# Altium PCB Nowhere_PCB_MkI.PcbDoc
Units mil, origin at the board's own origin, x right, y up, seen from the top; angles counter-clockwise.
Board outline 2755.91 x 2755.91 mil, 2 copper layers (Top Layer, Bottom Layer); 9 components, 9 nets, 30 pads, 0 vias.
Unrouted connection lines stored in the file: 10.
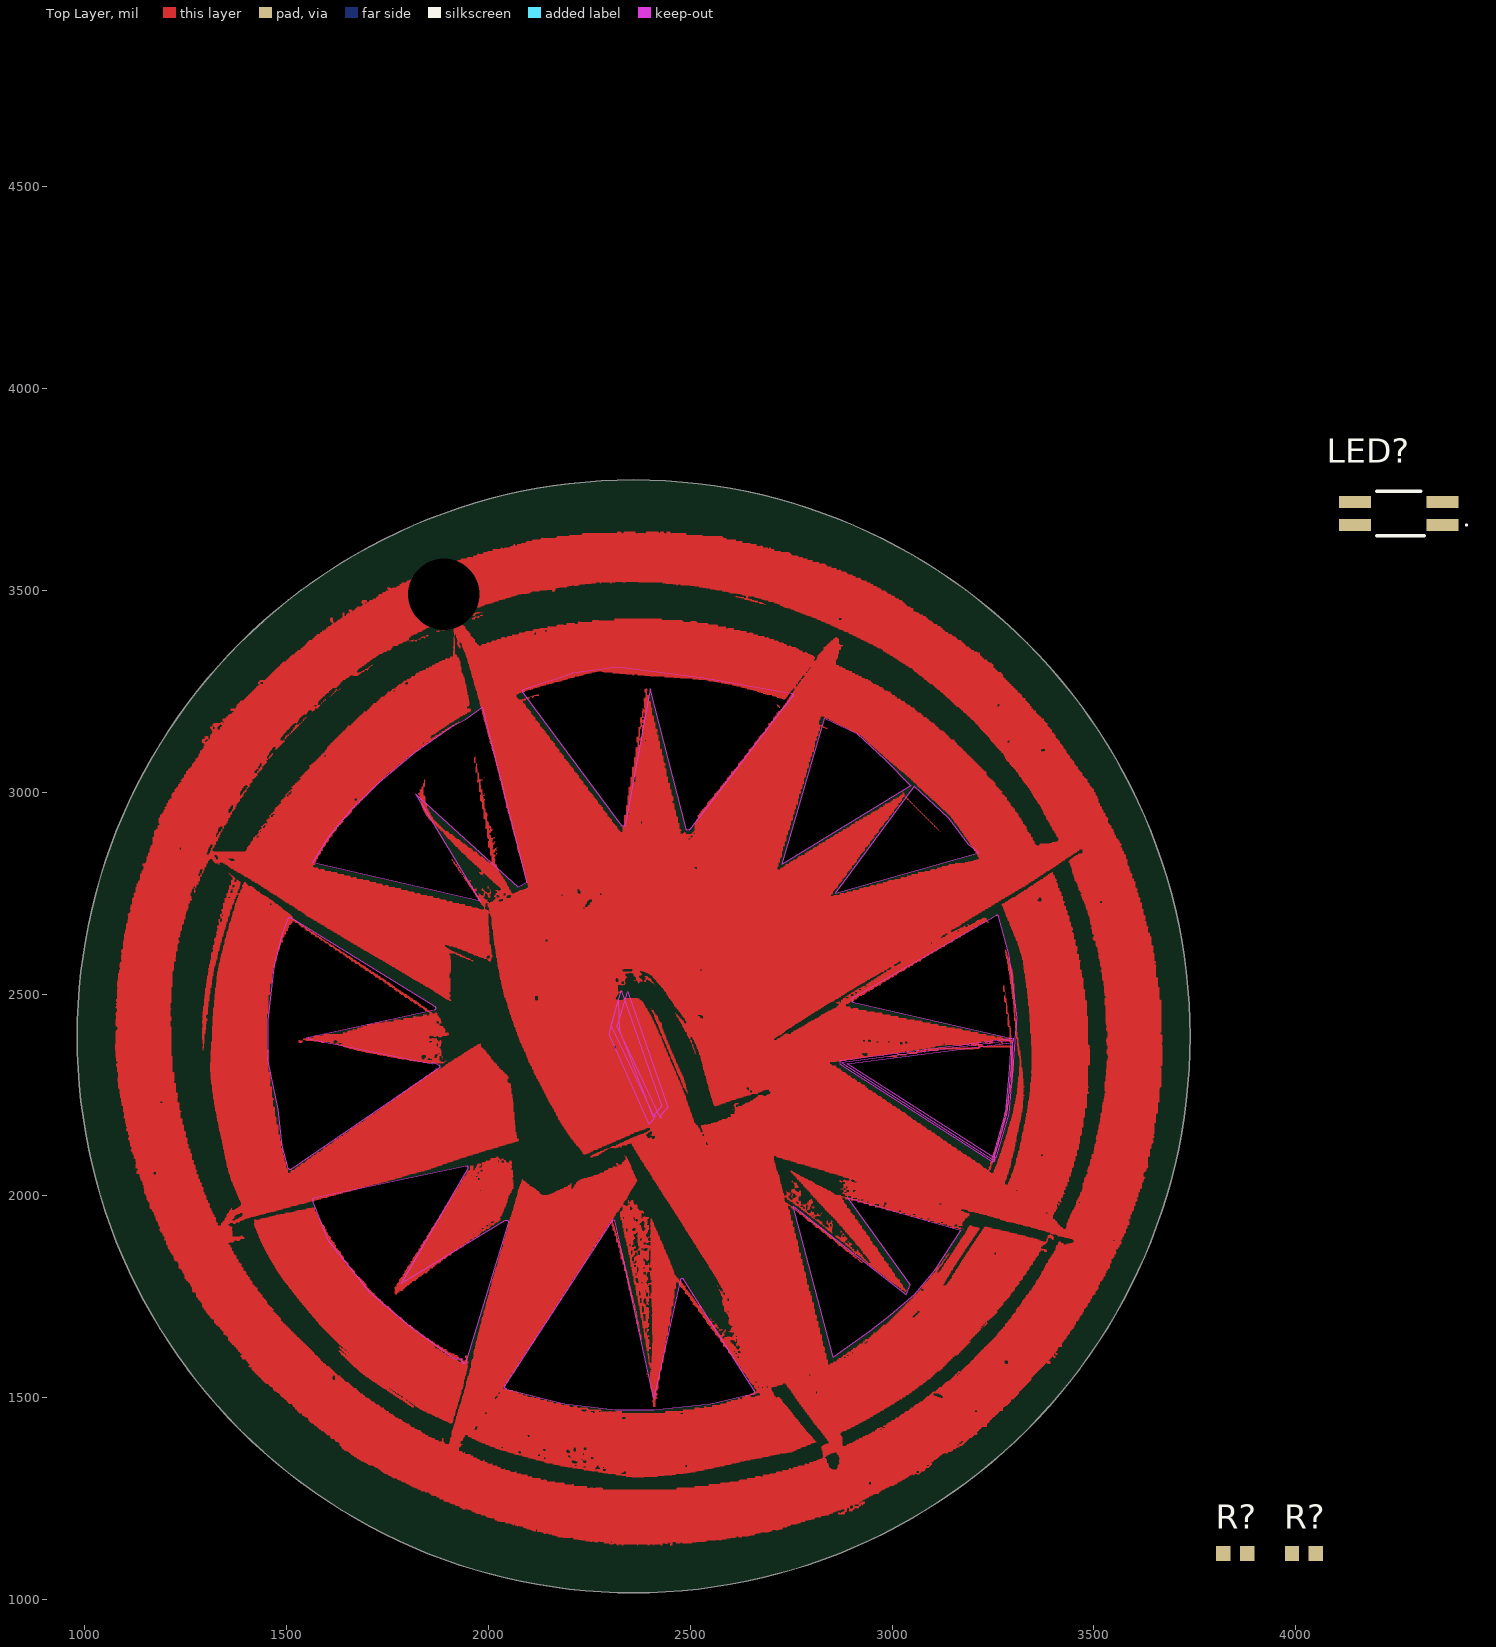
[diagram p0: Top Layer view]
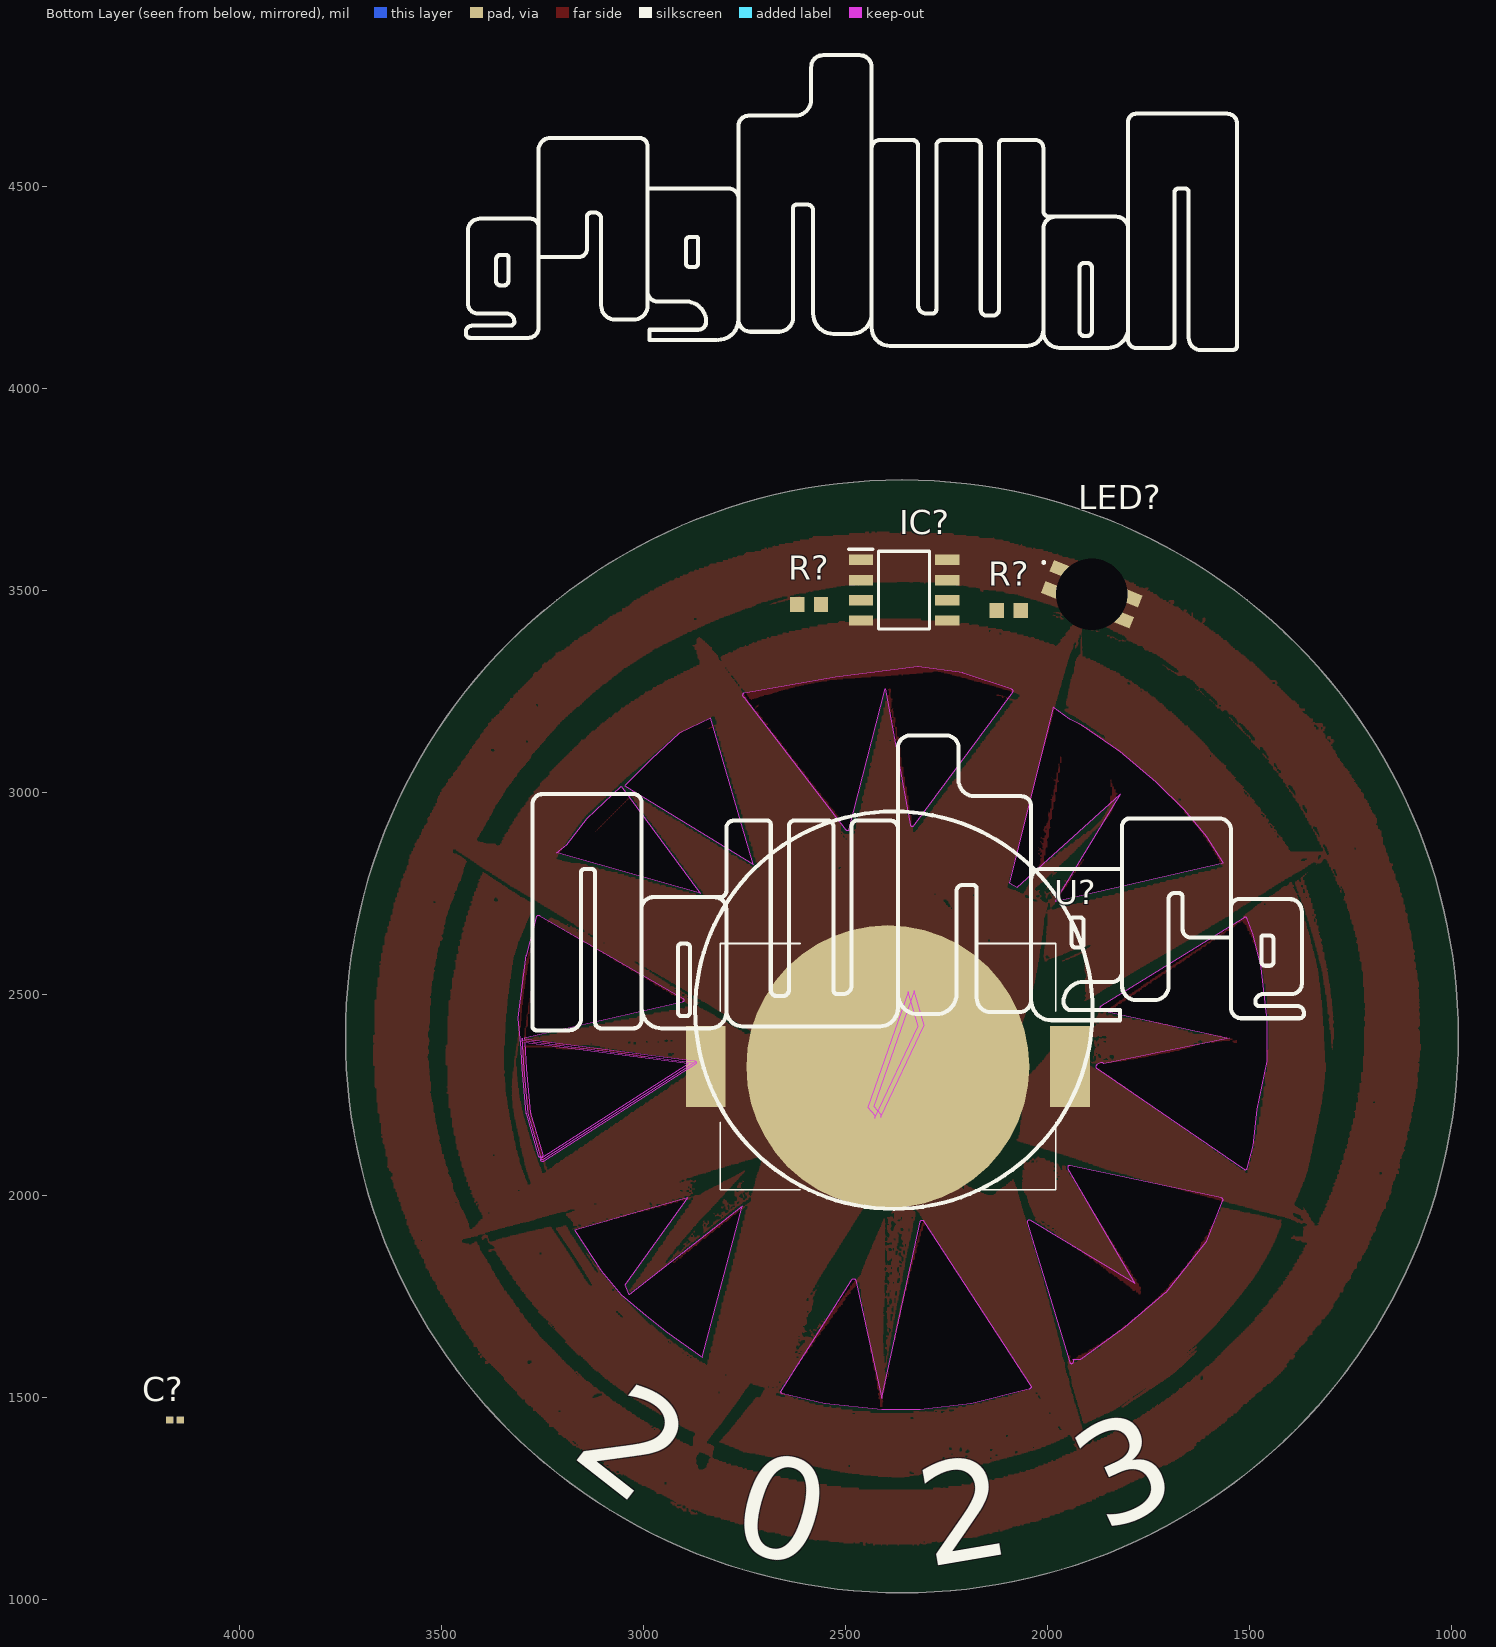
[diagram p1: Bottom Layer view, seen from below]

## Layer stack, top to bottom
Top Solder: solder mask 0.4, Solder Resist, Dk 3.5
Top Layer: signal copper 1.4
Dielectric 1: dielectric 12.6, FR-4, Dk 4.8
Bottom Layer: signal copper 1.4
Bottom Solder: solder mask 0.4, Solder Resist, Dk 3.5

## Board outline
2360,1017.05 cw(c2360,2395) 982.05,2395 cw(c2360,2395) 2360,3772.95 cw(c2360,2395) 3737.95,2395 cw(c2360,2395)
cut-out: 3247.3,2085.78 ccw(c3250,2090) 3255.01,2090 ccw(c3250,2090) 3252.7,2094.22 2889.31,2326.8 3294.25,2379.2 3290,2315.39 3280.05,2205.92 3250.18,2101.38 ccw(c3255,2100) 3259.82,2098.62 3289.82,2203.6 ccw(c3285.02,2205) 3289.99,2204.55 3299.99,2314.54 ccw(c3299.81,2314.56) 3300,2314.55 ccw(c3296.47,2314.88) 3300,2314.67 3304.55,2382.9 ccw(c3300,2385) 3305.01,2385 3305.01,2389.75 3309.99,2439.49 ccw(c3305.05,2440) 3310.01,2440 ccw(c3305.05,2440) 3309.97,2440.64 3289.97,2595.64 ccw(c3285.04,2595.01) 3289.85,2596.28 3264.85,2691.28 ccw(c3260,2690) 3257.49,2694.34 2902.49,2489.34 ccw(c2905,2485) 2903.89,2480.11 3294.99,2391 3294.99,2390.17 3294.93,2389.4 2874.37,2334.98 ccw(c2875,2330) 2872.3,2325.78
cut-out: 2188.78,1485.13 ccw(c2190,1489.99) 2189.4,1485.02 2314.4,1470.02 ccw(c2315,1474.99) 2315,1469.98 2410,1469.98 ccw(c2410,1475) 2410.53,1470.01 2550.53,1485.01 ccw(c2550,1489.99) 2551.17,1485.12 2656.15,1510.12 ccw(c2655,1515) 2660.01,1515 ccw(c2655,1515) 2659.23,1517.69 2484.23,1792.69 ccw(c2480,1790) 2475.1,1791.09 2410.05,1498.36 2314.91,1936.04 ccw(c2310,1935) 2305.8,1937.73 2040.8,1530.04 ccw(c2045,1527.31) 2043.73,1522.46 ccw(c2047.65,1525.59) 2046.43,1520.72
cut-out: 3247.3,2085.78 ccw(c3250,2090) 3255.01,2090 ccw(c3250,2090) 3252.7,2094.22 2889.31,2326.8 3294.25,2379.2 3290,2315.39 3280.05,2205.92 3250.18,2101.38 ccw(c3255,2100) 3259.82,2098.62 3289.82,2203.6 ccw(c3285.02,2205) 3289.99,2204.55 3299.99,2314.54 ccw(c3299.81,2314.56) 3300,2314.55 ccw(c3296.47,2314.88) 3300,2314.67 3304.55,2382.9 ccw(c3300,2385) 3305.01,2385 3305.01,2389.75 3309.99,2439.49 ccw(c3305.05,2440) 3310.01,2440 ccw(c3305.05,2440) 3309.97,2440.64 3289.97,2595.64 ccw(c3285.04,2595.01) 3289.85,2596.28 3264.85,2691.28 ccw(c3260,2690) 3257.49,2694.34 2902.49,2489.34 ccw(c2905,2485) 2903.89,2480.11 3294.99,2391 3294.99,2390.17 3294.93,2389.4 2874.37,2334.98 ccw(c2875,2330) 2872.3,2325.78
cut-out: 2085.98,3247 2085.97,3247.01 cw(c2090,3250) 2088.43,3254.76 2208.4,3294.75 cw(c2210,3290.01) 2209.32,3294.97 2209.33,3294.97 2319.31,3309.97 cw(c2320,3305.01) 2320.61,3309.98 2320.62,3309.98 2525.59,3284.98 cw(c2525.03,3280.22) 2525.88,3284.94 2750.88,3244.94 cw(c2750,3240) 2755.01,3240 cw(c2750,3240) 2750.01,3234.99 cw(c2745,3235) 2748.97,3231.94 2498.98,2906.95 cw(c2497.12,2908.36) 2498.97,2906.94 2498.98,2906.95 cw(c2495,2910) 2490.14,2908.77 2400.85,3256.51 2339.94,2919.11 cw(c2335,2920) 2330.96,2917.02
cut-out: 1480.04,2214.21 1455.09,2333.98 cw(c1460,2335) 1454.98,2335 1454.98,2435 cw(c1460,2435) 1455.02,2435.6 1470.02,2565.55 cw(c1475,2565) 1470.13,2566.22 1490.13,2646.22 cw(c1495,2645) 1490.3,2646.76 1505.3,2686.76 cw(c1510,2685) 1512.65,2689.26 1867.63,2469.27 1867.64,2469.26 1867.63,2469.27 cw(c1865,2465) 1870.02,2465 cw(c1865,2465) 1866.08,2460.1 1549.37,2390.24 1860.93,2327.93 cw(c1865,2325) 1867.24,2329.49 1877.24,2324.49 cw(c1875,2320) 1880.02,2320 cw(c1875,2320) 1877.82,2315.85 1877.83,2315.86 1877.82,2315.85 1512.85,2065.87 1512.83,2065.86 1512.85,2065.87 cw(c1510,2070) 1505.16,2068.68 1490.16,2123.68 cw(c1495,2125) 1490.01,2124.46 1490.02,2124.45 1490.01,2124.46
cut-out: 1706.75,1761.18 cw(c1710,1765) 1706.08,1761.87 1606.08,1886.87 cw(c1610,1890) 1605.34,1888.15 1605.34,1888.14 1605.34,1888.15 1565.35,1988.12 cw(c1570,1990) 1568.95,1994.9 1568.97,1994.91 1943.93,2074.9 cw(c1945,2070) 1950.02,2070 cw(c1945,2070) 1949.33,2067.47 1784.18,1784.36 2042.42,1939.3 2042.41,1939.29 cw(c2045,1935) 2050.01,1935 cw(c2045,1935) 2049.79,1933.53 2049.8,1933.54 2049.79,1933.53 1944.8,1588.54 cw(c1940,1590) 1935.2,1591.46 1936.33,1595.16 cw(c1935,1600) 1935,1594.98 1920,1594.98 cw(c1920,1600) 1917.05,1595.94 1807.05,1675.94 cw(c1810,1680) 1806.75,1676.18
cut-out: 2860,2750 3215,2850 3190,2870 3140,2935 3055,3015
cut-out: 2875,2330 3250,2090 3251.98,2089.43 3285,2205 3295,2315 3300,2390 3300,2385
cut-out: 2855,1600 2755,1975 3035,1755 3045,1780 2890,1995 3170,1915 3105,1815 3055,1755 2995,1705 2945,1665
cut-out: 2728.41,2821.03 2833.18,3182.96 2912.16,3145.79 2981.52,3081.39 3046.95,3015.95
cut-out: 1565,2825 1605,2890 1660,2955 1730,3025 1820,3100 1915,3165 1945,3180 1985,3210 2095,2775 2075,2765 1820,2995 1980,2730

## Design rules (kind name [scope] priority, off if disabled: settings)
Clearance [All] p1: gap=10 ignorepadtopadclearanceinfootprint=FALSE except(0: Arc-Hole Track-Hole SMDPad-Hole THPad-Hole Via-Hole Fill-Hole Poly-Hole Region-Hole Text-Hole)
PolygonConnect [All] p1: connectstyle=Relief reliefconductorwidth=10 reliefentries=4 polygonreliefangle="90 Angle" airgapwidth=10
RoutingVias [All] p1: holewidth=28 width=50 viastyle="Through Hole" minholewidth=28 minwidth=50 maxholewidth=28 maxwidth=50
SolderMaskExpansion [All] p1: expansion=4 istentingtop=FALSE
Width [All] p1: maxlimit=10 minlimit=10 preferedwidth=10
30 further rules are at their usual default settings.

## Classes and differential pairs
component class Sheet1: C? IC? LED? R? U?

## Components (designator, comment, footprint, x,y, rotation, side; value= is the part's Value field where it differs from the comment)
C? "02013A120GAT2A" CAPC0603X33N 4160,1445 r180 bottom
IC? "ATTINY25-20SSU" SOIC127P600X175-8N 2355,3500 r180 bottom
LED? "IN-P32TRRRGB" INP32TRRRGB 1890,3490 r22 bottom
LED? "T36K3BGR-05D000121U1930" T36K3BGR05D000121U1930 4255,3690 r0 top
R? "CPF0603B10KE" RESC1608X55N 3850,1115 r0 top
R? "CPF0603B10KE" RESC1608X55N 4020,1115 r0 top
R? "CPF0603B10KE" RESC1608X55N 2095.47,3450 r180 bottom
R? "CPF0603B10KE" RESC1608X55N 2590,3465 r180 bottom
U? "BAT-HLD-001-TR" BATHLD001TR 2395,2320 r0 bottom

## Footprints (in the part's own frame and the unit in brackets; to place one, negate y for a bottom-side part, rotate by r counter-clockwise, add the part's x,y. Pads: shape width x height; smd on the part's side, far side on the other; paste and mask are expansions set on the pad)
BATHLD001TR [mm]
  rect 2.5x5.1 smd: 1(-11.45,0) 3(11.45,0)
  round 17.8 smd: 2(0,0)
  silkscreen extent -10.55,-7.75 10.55,7.75, body extent -11.45,-7.77 11.45,7.78, height 4.2
CAPC0603X33N [mm]
  rect 0.47x0.44 smd: 1(-0.335,0) 2(0.335,0)
  body extent -0.3,-0.15 0.3,0.15, height 0.33
INP32TRRRGB [mm]
  rect 1.28x0.8 smd: 1(2.365,-0.725) 2(-2.365,-0.725) 3(-2.365,0.725) 4(2.365,0.725)
  round 2.25 hole 4.5 unplated: MH1(0,0)
  silkscreen extent 3.5,-0.77 3.6,-0.68
RESC1608X55N [mm]
  rect 0.9x0.95 smd: 1(-0.75,0) 2(0.75,0)
  body extent -0.77,-0.4 0.77,0.4, height 0.46
SOIC127P600X175-8N [mm]
  rect 1.525x0.65 smd: 1(-2.712,1.905) 2(-2.712,0.635) 3(-2.712,-0.635) 4(-2.712,-1.905) 5(2.712,-1.905) 6(2.712,-0.635) 7(2.712,0.635) 8(2.712,1.905)
  silkscreen extent -3.47,-2.45 1.6,2.58, body extent -3,-2.45 3,2.45, height 1.75
T36K3BGR05D000121U1930 [mm]
  rect 2x0.75 smd: 1(2.75,-0.725) 2(-2.75,-0.725) 3(-2.75,0.725) 4(2.75,0.725)
  silkscreen extent -1.4,-1.4 4.3,1.4

## Part data
C?: "Capacitor", Manufacturer_Name=AVX, Mouser Part Number=581-02013A120GAT2A, Arrow Part Number=02013A120GAT2A, Arrow Price/Stock=https://www.arrow.com/en/products/02013a120gat2a/avx, Datasheet Link=http://www.mouser.com/catalog/supplier/library/pdf/AVXSurfaceMountCeramic.pdf, Height=0.33mm, Manufacturer_Part_Number=02013A120GAT2A, Mouser Price/Stock=https://www.mouser.com/Search/Refine.aspx?Keyword=581-02013A120GAT2A
IC?: "Integrated Circuit", Manufacturer_Name=Microchip, Mouser Part Number=556-ATTINY25-20SSU, Arrow Part Number=ATTINY25-20SSU, Arrow Price/Stock=https://www.arrow.com/en/products/attiny25-20ssu/microchip-technology?region=nac, Datasheet Link=http://www.atmel.com/Images/Atmel-2586-AVR-8-bit-Microcontroller-ATtiny25-ATtiny45-ATtiny85_Datasheet.pdf, Height=1.75mm, Manufacturer_Part_Number=ATTINY25-20SSU, Mouser Price/Stock=https://www.mouser.co.uk/ProductDetail/Microchip-Technology/ATTINY25-20SSU?qs=W7X4MxMep4%2FZkAO8oc8Rxw%3D%3D
LED?: "LED", Manufacturer_Name=Inolux, Mouser Part Number=743-IN-P32TRRRGB, Arrow Part Number=IN-P32TRRRGB, Arrow Price/Stock=https://www.arrow.com/en/products/in-p32trrrgb/inolux-corporation?region=nac, Datasheet Link=http://www.inolux-corp.com/datasheet/SMDLED/Mono%20Color%20Reverse%20Mount/IN-P32TRRRGB_V1.2.pdf, Height=1.17mm, Manufacturer_Part_Number=IN-P32TRRRGB, Mouser Price/Stock=https://www.mouser.co.uk/ProductDetail/Inolux/IN-P32TRRRGB?qs=stqOd1AaK7%252BDecAY%252B9SBpg%3D%3D
LED?: "LED", Manufacturer_Name=Harvatek, Datasheet Link=https://media.digikey.com/pdf/Data%20Sheets/Harvatek%20PDFs/T36K3BGR-05D000121U1930%20V1.1.pdf, Height=1.95mm, Manufacturer_Part_Number=T36K3BGR-05D000121U1930
R? R? R? R?: "Resistor", Manufacturer_Name="TE Connectivity", Mouser Part Number=279-CPF0603B10KE, Arrow Part Number=CPF0603B10KE, Arrow Price/Stock=https://www.arrow.com/en/products/cpf0603b10ke/te-connectivity?region=nac, Datasheet Link=http://www.farnell.com/datasheets/1786775.pdf, Height=0.55mm, Manufacturer_Part_Number=CPF0603B10KE, Mouser Price/Stock=https://www.mouser.co.uk/ProductDetail/TE-Connectivity-Holsworthy/CPF0603B10KE?qs=DfH2yQaBz6sBU3bWyKu9NQ%3D%3D
U?: "Undefined or Miscellaneous", Manufacturer_Name="Linx Technologies", Mouser Part Number=712-BAT-HLD-001-TR, Datasheet Link=https://datasheet.datasheetarchive.com/originals/distributors/DKDS-31/603271.pdf, Height=4.2mm, Manufacturer_Part_Number=BAT-HLD-001-TR, Mouser Price/Stock=https://www.mouser.co.uk/ProductDetail/Linx-Technologies/BAT-HLD-001-TR?qs=K5ta8V%252BWhtZh3MyWmkkmjQ%3D%3D

## Nets (pads, with @x,y where several pads share a name; then routed paths per layer and width w, separated by ;. In a path a pad name is that pad's centre, name@x,y a point inside that pad or via, vN(x,y) a via of type N, cw(c..) or ccw(c..) an arc to the next point about the centre after c; other vN are vias at no path point)
+5: C?.2 IC?.1 IC?.8 LED?.3@4146.73,3718.54 U?.1 U?.3
B: LED?.1@4363.27,3661.46
GND: C?.1 IC?.4 U?.2
GREE: LED?.4@4363.27,3718.54
NetIC?_3: IC?.3 R?.2@2560.47,3465
NetIC?_5: IC?.5 R?.1@3820.47,1115
NetIC?_6: IC?.6 R?.1@2125,3450
OUTSIDE: R?.1@3990.47,1115
R: LED?.2@4146.73,3661.46
pads on no net: IC?.2 IC?.7 LED?.1@1965.64,3551.34 LED?.2@1792.98,3481.59 LED?.3@1814.36,3428.66 LED?.4@1987.02,3498.41 LED?.MH1 R?.1@2619.53,3465 R?.2@2065.94,3450 R?.2@3879.53,1115 R?.2@4049.53,1115

## Keep-outs
Top Layer:
  region: 2399.14,2176.88 2300,2400 2322.5,2485 2325,2410 2410,2190 2400,2180
Keep-Out Layer:
  region: 2427.5,2192.5 2320,2420 2345,2505 2445,2220 2427.5,2200
  region: 2412.5,2195 2305,2422.5 2330,2507.5 2430,2222.5 2412.5,2202.5

## Other copper
Top Layer:
  pour cut-out: 2442.5,2180 2347.5,2400 2337.5,2480 2442.5,2200 2442.5,2195
  pour cut-out: 2390,2175 2295,2430 2322.35,2514.6 2450,2235 2400,2180
  region net OUTSIDE: 3723 vertices and 321 holes, not listed, extent 1075.85,1133.73 3669.42,3644.86
  pour cut-out: 2693.33,2263.16 2675,2370 2645,2480 2515,2705 2450,2780 2480,2785 2691.68,2433.32 2737.33,2284.96 2691.68,2251.62
  region: 2390,2175 2305,2410 2315.75,2488.22 2325,2410 2400,2180 2398.27,2173.76
  region net +5: 1065 vertices and 14 holes, not listed, extent 1420.77,1446.97 1950.04,1971.29
  region net +5: 625 vertices and 30 holes, not listed, extent 1768.67,1766.84 2062.16,2096.6
  region net +5: 1065 vertices and 14 holes, not listed, extent 1420.29,1437.2 1949.55,1961.52
  region net +5: 625 vertices and 30 holes, not listed, extent 1768.18,1757.07 2061.67,2086.83

## Silkscreen, mask and mechanical layers (free items; w line width, h text height)
Bottom Overlay:
  drawing of 305 lines, arcs and shapes, not listed
  text "2" at 3185,1360 h250 r37.98
  text "3" at 1860,1165 h250 r335.51
  text "0" at 2795,1135 h250 r15.39
  text "2" at 2295,1080 h250 r350.34
Top Solder:
  drawing of 5 lines, arcs and shapes, not listed
Mechanical 1:
  drawing of 502 lines, arcs and shapes, not listed
Mechanical 2:
  lines w10: 1865,2325 1875,2320 ; 1935,1600 1920,1600 1810,1680 1710,1765 1610,1890 1570,1990 1945,2070 1770,1770 2045,1935 1940,1590 ; 2045,1527.31 2310,1935 2410,1475 ; 2047.65,1525.59 2190,1490 2315,1475 2410,1475 ; 2735,3240 2750,3240 2525,3280 2320,3305 2210,3290 2090,3250 2335,2920 2400,3280 2495,2910 2745,3235 ; 3250,2090 2875,2330 3300,2385 3300,2395 2905,2485 3260,2690 3285,2595 3305,2440 3300,2390 3295,2315 3285,2205 3251.98,2089.43 ; 1875,2320 1525,2390 1865,2465 1510,2685 1495,2645 1475,2565 1460,2435 1460,2335 1485,2215 1495,2125 1510,2070 1875,2320 ; 2410,1475 2550,1490 2655,1515 2480,1790 2410,1475 ; 3055,3015 3140,2935 3190,2870 3215,2850 2860,2750 3055,3015 ; 3055,3015 2985,3085 2915,3150 2830,3190 2720,2810 3055,3015 ; 1565,2825 1605,2890 1660,2955 1730,3025 1820,3100 1915,3165 1945,3180 1985,3210 2095,2775 2075,2765 1820,2995 1980,2730 1565,2825 ; 2755,1975 3035,1755 3045,1780 2890,1995 3170,1915 3105,1815 3055,1755 2995,1705 2945,1665 2855,1600 2755,1975